# Altium PCB Panelmeter_PCB.PcbDoc (part 1 of 2)
Units mm, origin at the board's own origin, x right, y up, seen from the top; angles counter-clockwise.
Board outline 100 x 44.59 mm, 2 copper layers (Top Layer, Bottom Layer); 74 components, 60 nets, 256 pads, 123 vias.
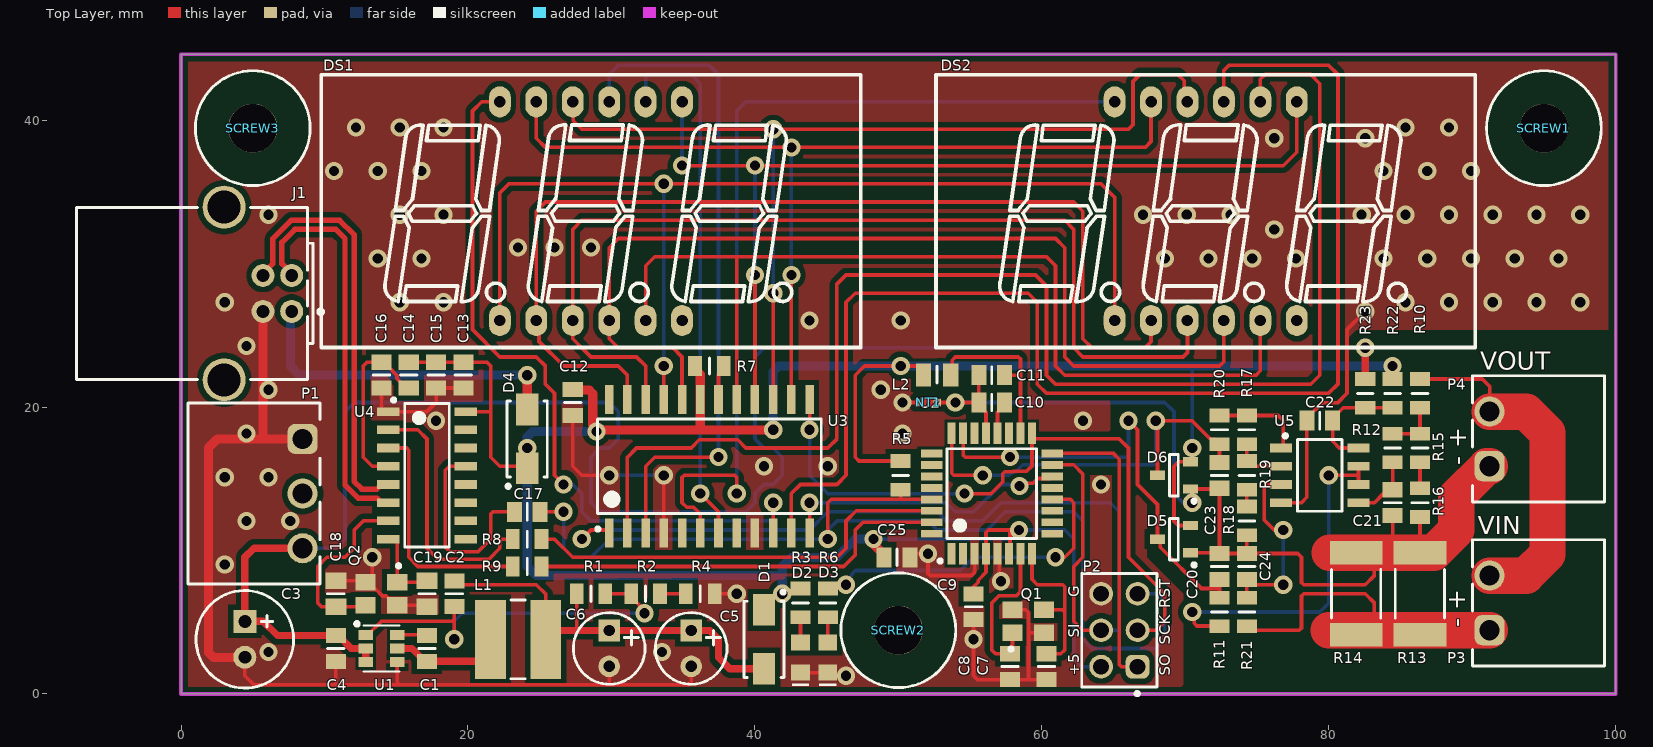
[diagram p0: Top Layer view]
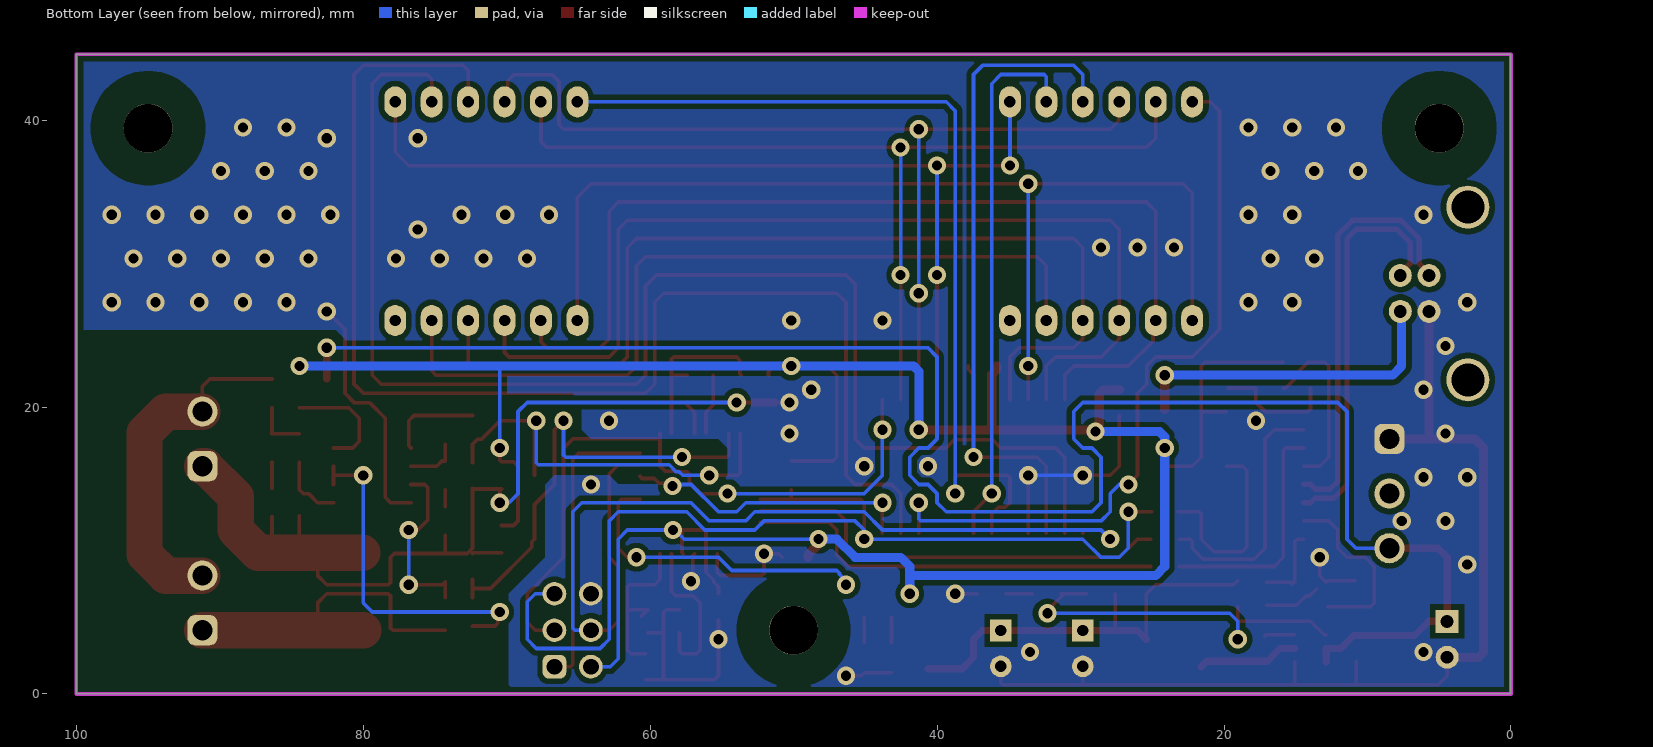
[diagram p1: Bottom Layer view, seen from below]
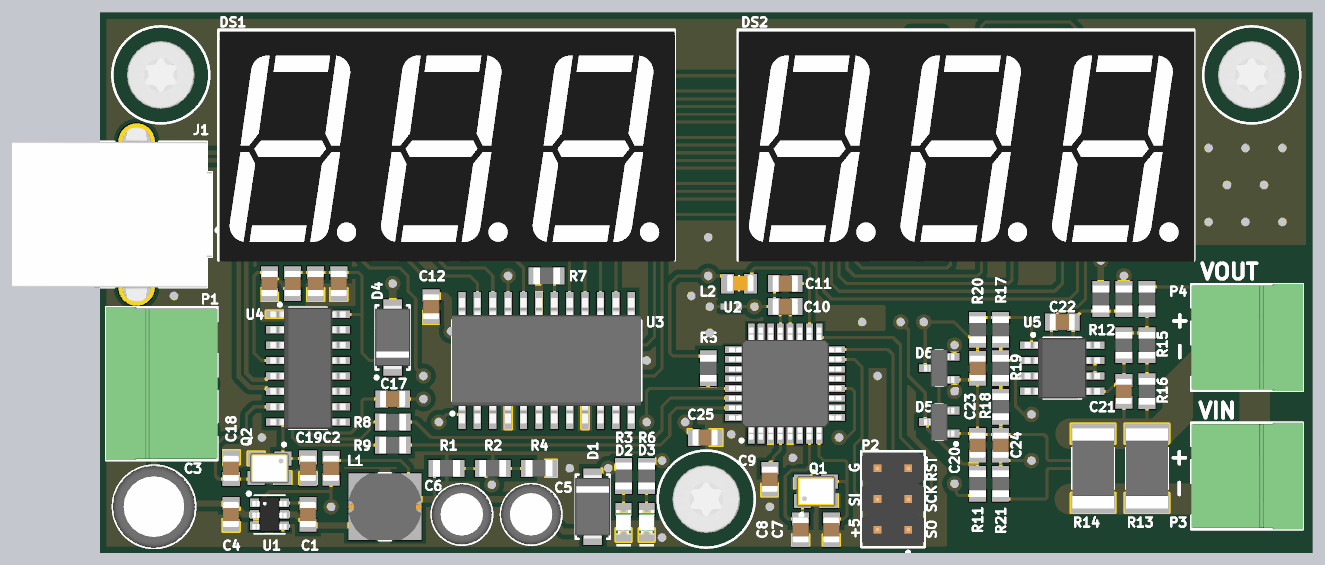
[diagram p2: 3D render of the assembled board from above, using the file's embedded part models]

## Layer stack, top to bottom
Top Solder: solder mask 0.0102, Solder Resist, Dk 3.5
Top Layer: signal copper 0.0356
Dielectric 1: dielectric 0.32, FR-4, Dk 4.8
Bottom Layer: signal copper 0.0356
Bottom Solder: solder mask 0.0102, Solder Resist, Dk 3.5

## Board outline
0,0 100,0 100,44.585 0,44.585

## Design rules (kind name [scope] priority, off if disabled: settings)
Clearance MCU [All vs InComponent('U1') or InComponent('U2')] p1: gap=0.229 ignorepadtopadclearanceinfootprint=FALSE
Clearance Srew [(ObjectKind = 'Pad') And (AsMils(HoleDiameter) = 133.858) And (AsMils(PadXSize_AllLayers) = 133.858) And (AsMils(PadYSize_AllLayers) = 133.858)] p2: gap=2.286 ignorepadtopadclearanceinfootprint=FALSE
Clearance Polygon_Clearance [InPolygon] p3: gap=0.381 ignorepadtopadclearanceinfootprint=FALSE
Clearance Clearance_1 [All] p4: gap=0.254 ignorepadtopadclearanceinfootprint=FALSE
DiffPairsRouting [All] p1: maxlimit=0.254 minlimit=0.254 mostfreqgap=0.254 toplayer_minwidth=0.381 toplayer_maxwidth=0.381 toplayer_prefwidth=0.381 bottomlayer_minwidth=0.381 bottomlayer_maxwidth=0.381 bottomlayer_prefwidth=0.381 maxuncoupledlength=12.7
HoleSize [All] p1: absolutevalues=TRUE maxlimit=3.5 minlimit=0.025 maxpercent=80.000 minpercent=20.000
MinimumSolderMaskSliver [All] p1: minsoldermaskwidth=0.025
PolygonConnect [All] p1: connectstyle=Direct reliefconductorwidth=0.254 reliefentries=4 polygonreliefangle="90 Angle" airgapwidth=0.254
RoutingVias [All] p1: holewidth=0.711 width=1.27 viastyle="Through Hole" minholewidth=0.711 minwidth=1.27 maxholewidth=0.711 maxwidth=1.27
SilkToSilkClearance [All] p1: silktosilkclearance=0.051
SilkToSolderMaskClearance [IsPad] p1: minsilkscreentomaskgap=0.051 clearancetoexposedcopper=TRUE
SolderMaskExpansion [All] p1: expansion=0.102 istentingtop=FALSE
Width [All] p1: maxlimit=2.54 minlimit=0.254 preferedwidth=0.254 minimp=50.000000 maximp=50.000000 favimp=50.000000
25 further rules are at their usual default settings.

## Classes and differential pairs
component class U_USB2UART: C13 C14 C15 C16 C17 C18 C19 D4 J1 Q2 R8 R9 U4
component class U_Display: C12 DS1 DS2 R7 U3
component class U_Analog: C20 C21 C22 C23 C24 D5 D6 NT1 P3 P4 R10 R11 R12 R13 R14 R15 R16 R17 R18 R19 R20 R21 R22 R23 U5
component class MCU: C1 C2 C3 C4 C5 C6 C7 C8 C9 C10 C11 C25 D1 D2 D3 L1 L2 P1 P2 Q1 R1 R2 R3 R4 R5 R6 SCREW1 SCREW2 SCREW3 U1 U2
differential pair D: +D_P -D_N

## Components (designator, comment, footprint, x,y, rotation, side; value= is the part's Value field where it differs from the comment)
C1 "100nF" CAPC2012X135N 17.145,3.175 r270 top
C2 "100pF" CAPC2012X135N 19.05,6.985 r90 top
C3 "100uF" CAPPR250-680X1250 4.445,3.81 r270 top
C4 "100nF" CAPC2012X135N 10.795,3.175 r90 top
C5 "22uF" CAPPR250-500X1100 35.56,3.175 r270 top
C6 "22uF" CAPPR250-500X1100 29.845,3.175 r270 top
C7 "18pF" CAPC2012X135N 60.325,1.905 r90 top
C8 "18pF" CAPC2012X135N 57.785,1.905 r270 top
C9 "100nF" CAPC2012X135N 55.245,6.085 r90 top
C10 "100nF" CAPC2012X135N 56.515,20.32 r0 top
C11 "100nF" CAPC2012X135N 56.515,22.225 r0 top
C12 "100nF" CAPC2012X135N 27.305,20.32 r90 top
C13 "10uF" CAPC2012X135N 19.685,22.225 r90 top
C14 "100nF" CAPC2012X135N 15.875,22.225 r270 top
C15 "100nF" CAPC2012X135N 17.78,22.225 r90 top
C16 "100nF" CAPC2012X135N 13.97,22.225 r90 top
C17 "100nF" CAPC2012X135N 24.13,12.7 r0 top
C18 "22pF" CAPC2012X88N 10.795,6.985 r270 top
C19 "22pF" CAPC2012X88N 17.145,6.985 r90 top
C20 "100nF" CAPC2012X135N 72.39,8.89 r270 top
C21 "100nF" CAPC2012X135N 84.455,13.335 r90 top
C22 "100nF" CAPC2012X135N 79.375,19.05 r0 top
C23 "100nF" CAPC2012X135N 72.39,15.24 r90 top
C24 "100nF" CAPC2012X135N 74.295,8.89 r270 top
C25 "100nF" CAPC2012X135N 49.9,9.525 r180 top
D1 "SS16" DIOM5127X229N 40.64,3.81 r270 top
D2 "Green, 3.2V, 140°" WL-SMCW_0805_150080xx75000 43.18,2.54 r90 top
D3 "Red, 2V, 140°" WL-SMCW_0805_150080xx75000 45.085,2.54 r90 top
D4 "SS16" DIOM5127X229N 24.13,17.78 r90 top
D5 "BAV99" SOT95P240X110-3N 69.215,10.795 r180 top
D6 "BAV99" SOT95P240X110-3N 69.215,15.24 r180 top
DS1 "7SEGMENT-3DIG-CC" 7SEGMENT-3DIG 28.575,33.655 r0 top locked
DS2 "7SEGMENT-3DIG-CC" 7SEGMENT-3DIG 71.425,33.655 r0 top locked
J1 "USB 2.0" ASSMANN_A-USBSB 6.715,27.92 r270 top
L1 "10uH" IND_TRACO_TCK-047 23.495,3.81 r0 top
L2 "10uH" INDC2014X145N 52.705,22.225 r0 top
NT1 "" NET-TIE 52.07,20.32 r180 top net-tie
P1 "691322310003" 691322310003 5.08,13.97 r270 top
P2 "61300621121" 61300621121 65.405,4.445 r90 top
P3 "691322310002" 691322310002 94.615,6.35 r90 top
P4 "691322310002" 691322310002 94.615,17.78 r90 top
Q1 "16MHz" XTAL_EPSON_TSX-3225 59.055,5.08 r90 top
Q2 "12MHz" XTAL_EPSON_TSX-3225 13.97,6.985 r270 top
R1 "270k" RESC2012X60N 28.575,6.985 r180 top
R2 "51k" RESC2012X60N 32.385,6.985 r180 top
R3 "680" RESC2012X60N 43.18,6.35 r90 top
R4 "430" RESC2012X60N 36.195,6.985 r180 top
R5 "10k" RESC2012X60N 50.165,15.24 r90 top
R6 "1k" RESC2012X60N 45.085,6.35 r90 top
R7 "68k" RESC2012X60N 36.83,22.86 r180 top
R8 "470" RESC2012X60N 24.13,10.795 r0 top
R9 "470" RESC2012X60N 24.13,8.89 r0 top
R10 "270k" RESC2012X60N 86.36,20.955 r90 top
R11 "1k" RESC2012X60N 72.39,5.715 r90 top
R12 "1k" RESC2012X60N 84.455,17.145 r270 top
R13 "0R05" RESC_VISHAY_WSL2512_0R007-0R5 86.36,6.985 r270 top
R14 "0R05" RESC_VISHAY_WSL2512_0R007-0R5 81.915,6.985 r270 top
R15 "8k2" RESC2012X60N 86.36,17.145 r90 top
R16 "560" RESC2012X60N 86.36,13.335 r90 top
R17 "100k" RESC2012X60N 74.295,18.415 r90 top
R18 "820" RESC2012X60N 74.295,12.065 r90 top
R19 "12k" RESC2012X60N 74.295,15.24 r90 top
R20 "1k" RESC2012X60N 72.39,18.415 r270 top
R21 "1k" RESC2012X60N 74.295,5.715 r90 top
R22 "0" RESC2012X60N 84.455,20.955 r90 top
R23 "0" RESC2012X60N 82.55,20.955 r90 top
SCREW1 "M3x6" BOSSARD_BN5687-3061605_v 95,39.44 r0 top locked
SCREW2 "M3x6" BOSSARD_BN5687-3061605_v 50,4.445 r0 top locked
SCREW3 "M3x6" BOSSARD_BN5687-3061605_v 5,39.44 r0 top locked
U1 "AP63200WU-7" TSOT26 13.97,3.175 r270 top
U2 "ATMEGA328P-AU" QFP80P900X900X120-32N 56.515,13.97 r90 top
U3 "MAX7219CWG+" SOIC-24W 36.83,15.875 r90 top
U4 "CH340G" SOIC-16 17.145,15.24 r0 top
U5 "LM358AD" SOIC127P600X175-8N 79.375,15.24 r0 top

## Footprints (in the part's own frame and the unit in brackets; to place one, negate y for a bottom-side part, rotate by r counter-clockwise, add the part's x,y. Pads: shape width x height; smd on the part's side, far side on the other; paste and mask are expansions set on the pad)
7SEGMENT-3DIG [mil] "14.2mm 37.6x19mm 7 Segment Display"
  oval 60x85 hole 31.5: 1(-250,-300) 2(-150,-300) 3(-50,-300) 4(50,-300) 5(150,-300) 6(250,-300) 7(250,300) 8(150,300) 9(50,300) 10(-50,300) 11(-150,300) 12(-250,300)
  silkscreen extent -740,-374 740,374, body extent -738,-379 742,369, height 315
61300621121 [mm] "Pin Header, pitch 2.54 mm, THT, Vertical, dual row, 6p"
  rrect50% 1.65x1.65 hole 1.1: 1(-2.54,-1.27)
  round 1.65 hole 1.1: 2(-2.54,1.27) 3(0,-1.27) 4(0,1.27) 5(2.54,-1.27) 6(2.54,1.27)
  silkscreen extent -4.54,-2.62 3.96,2.62, body extent -3.81,-2.54 3.81,2.54, height 8.59
691322310002 [mm] "Horizontal PCB Header, pitch 3.81mm, 02p"
  rrect50% 2.1x2.1 hole 1.4: 1(-1.905,3.4)
  round 2.1 hole 1.4: 2(1.905,3.4)
  silkscreen extent -4.4,-4.6 4.41,4.6, body extent -4.4,-4.6 4.41,4.6, height 7.25
691322310003 [mm] "Horizontal PCB Header, pitch 3.81mm, 03p"
  rrect50% 2.1x2.1 hole 1.4: 1(-3.81,3.4)
  round 2.1 hole 1.4: 2(0,3.4) 3(3.81,3.4)
  silkscreen extent -6.31,-4.6 6.31,4.6, body extent -6.31,-4.6 6.31,4.6, height 7.25
ASSMANN_A-USBSB [mm] "USB 2.0 Style B Right Angle 4 Contacts Receptacle"
  round 1.6 hole 0.9: 1(1.25,1) 2(-1.25,1) 3(-1.25,-1) 4(1.25,-1)
  round 3 hole 2.3: 5(-6.02,-3.71) 5(6.02,-3.71)
  silkscreen extent -6,-14.01 6,3.17, body extent -7.3,-14.01 7.3,2.49, height 10.85
BOSSARD_BN5687-3061605_v [mm] "M3 L=6mm Hexalobular Socket Pan Head Screw, Fully Threaded - Stainless Steel A2"
  silkscreen extent -4,-4 4,4, body extent -2.8,-2.8 2.8,2.8, height 2.4
CAPC2012X88N [mm] "Chip Capacitor, Body 2.0x1.25mm, IPC Medium Density"
  rect 1.15x1.45 smd: 1(-0.9,0) 2(0.9,0)
  silkscreen extent 0,-0.58 0,0.58, body extent -1.05,-0.67 1.05,0.68, height 0.9
CAPC2012X135N [mm] "Chip Capacitor, Body 2.0x1.25mm, IPC Medium Density"
  rect 1.05x1.4 smd: 1(-0.9,0) 2(0.9,0)
  silkscreen extent 0,-0.58 0,0.58, body extent -1.05,-0.67 1.05,0.68, height 1.25
CAPPR250-500X1100 [mm] "Capacitor, Radial, Pin spacing 2.5mm - Body Diameter 5.0mm X Body Height 11mm"
  rect 1.5x1.5 hole 0.8: 1(-1.25,0)
  round 1.5 hole 0.8: 2(1.25,0)
  silkscreen extent -2.5,-2.5 2.5,2.5, body extent -2.51,-2.51 2.49,2.49, height 10.9
CAPPR250-680X1250 [mm] "Capacitor, Radial, Pin spacing 2.5mm - Body Diameter 6.8mm X Body Height 12.5mm"
  rect 1.6x1.6 hole 0.9: 1(-1.25,0)
  round 1.6 hole 0.9: 2(1.25,0)
  silkscreen extent -3.4,-3.4 3.4,3.4, body extent -3.41,-3.41 3.39,3.39, height 12.5
DIOM5127X229N [mm] "DO-214-AC/SMA Diode, Molded Body; 5.10mm L X 2.67mm W X 2.29mm H, IPC Medium Density"
  rect 2.2x1.55 smd: 1(-2.05,0) 2(2.05,0)
  silkscreen extent -3.42,-1.4 2.65,1.45, body extent -2.67,-1.45 2.68,1.45, height 2.29
IND_TRACO_TCK-047 [mm] "SMD Common Mode Choke, Body 5.8x5.2mm"
  rect 2.15x5.5 smd: 1(-1.925,0) 2(1.925,0)
  silkscreen extent -0.5,-2.75 0.5,2.75, body extent -3.05,-2.75 3.05,2.75, height 5.15
INDC2014X145N [mm] "Chip Inductor, EIA 0805, Metric 2014, Body 2.05x1.4mm, IPC Medium Density"
  rect 1.05x1.6 smd: 1(-0.95,0) 2(0.95,0)
  silkscreen extent 0,-0.55 0,0.63, body extent -1,-0.66 1.2,0.74, height 1.45
NET-TIE [mil]
  rect 20x20 smd mask+4: 1(-25,0) 2(25,0)
  Top Layer region: -35,10 35,10 35,-10 -35,-10
QFP80P900X900X120-32N [mm] "QFP,0.80mm Pitch, Square; 32 Pin, 7.00mm L X 7.00mm W X 1.20mm H Body, IPC Medium Density"
  rect 1.5x0.55 smd: 1(-4.2,2.8) 2(-4.2,2) 3(-4.2,1.2) 4(-4.2,0.4) 5(-4.2,-0.4) 6(-4.2,-1.2) 7(-4.2,-2) 8(-4.2,-2.8) 17(4.2,-2.8) 18(4.2,-2) 19(4.2,-1.2) 20(4.2,-0.4) 21(4.2,0.4) 22(4.2,1.2) 23(4.2,2) 24(4.2,2.8)
  rect 0.55x1.5 smd: 9(-2.8,-4.2) 10(-2,-4.2) 11(-1.2,-4.2) 12(-0.4,-4.2) 13(0.4,-4.2) 14(1.2,-4.2) 15(2,-4.2) 16(2.8,-4.2) 25(2.8,4.2) 26(2,4.2) 27(1.2,4.2) 28(0.4,4.2) 29(-0.4,4.2) 30(-1.2,4.2) 31(-2,4.2) 32(-2.8,4.2)
  silkscreen extent -4.82,-3.13 3.13,3.72, body extent -4.62,-4.62 4.62,4.62, height 1.2
RESC2012X60N [mm] "Chip Resistor, EIA 0805, Metric 2012, Body 2.0x1.2mm, IPC Medium Density"
  rect 0.95x1.4 smd: 1(-1,0) 2(1,0)
  silkscreen extent 0,-0.55 0,0.55, body extent -1.1,-0.67 1.1,0.68, height 0.6
RESC_VISHAY_WSL2512_0R007-0R5 [mm] "WSL2512 Chip Resistor Series (For R=0.007 to 0.5, 6.35mm L X 3.18mm W X 0.635mm H"
  rect 1.65x3.68 smd: 1(-2.855,0) 2(2.855,0)
  silkscreen extent -1.68,-1.72 1.68,1.72, body extent -3.3,-1.72 3.3,1.72, height 0.89
SOIC127P600X175-8N [mm] "SOIC 8, Pitch 1.27mm - Body 4x5mm, IPC Medium Density"
  rect 1.55x0.6 smd: 1(-2.7,1.905) 2(-2.7,0.635) 3(-2.7,-0.635) 4(-2.7,-1.905) 5(2.7,-1.905) 6(2.7,-0.635) 7(2.7,0.635) 8(2.7,1.905)
  silkscreen extent -2.52,-2.5 1.55,2.88, body extent -3.1,-2.5 3.1,2.5, height 1.75
SOIC-16 [mm] "SOIC 16, Pitch 1.27mm - Body 4x10mm, IPC Medium Density"
  rect 1.55x0.6 smd: 1(-2.7,4.445) 2(-2.7,3.175) 3(-2.7,1.905) 4(-2.7,0.635) 5(-2.7,-0.635) 6(-2.7,-1.905) 7(-2.7,-3.175) 8(-2.7,-4.445) 9(2.7,-4.445) 10(2.7,-3.175) 11(2.7,-1.905) 12(2.7,-0.635) 13(2.7,0.635) 14(2.7,1.905) 15(2.7,3.175) 16(2.7,4.445)
  silkscreen extent -2.45,-5 1.55,5.37, body extent -3.1,-5 3.1,5, height 1.75
SOIC-24W [mm] "SOIC 24, Pitch 1.27mm - Body 7.6x15.6mm, IPC Medium Density"
  rect 2x0.6 smd: 1(-4.65,6.985) 2(-4.65,5.715) 3(-4.65,4.445) 4(-4.65,3.175) 5(-4.65,1.905) 6(-4.65,0.635) 7(-4.65,-0.635) 8(-4.65,-1.905) 9(-4.65,-3.175) 10(-4.65,-4.445) 11(-4.65,-5.715) 12(-4.65,-6.985) 13(4.65,-6.985) 14(4.65,-5.715) 15(4.65,-4.445) 16(4.65,-3.175) 17(4.65,-1.905) 18(4.65,-0.635) 19(4.65,0.635) 20(4.65,1.905) 21(4.65,3.175) 22(4.65,4.445) 23(4.65,5.715) 24(4.65,6.985)
  silkscreen extent -4.5,-7.8 3.3,7.9, body extent -5.18,-7.8 5.18,7.8, height 1.68
SOT95P240X110-3N [mm] "SOT23 3-Leads, Pitch 0.95mm, Body 1.3x2.9mm, IPC Medium Density"
  rect 1.05x0.65 smd: 1(-1.15,0.95) 2(-1.15,-0.95) 3(1.15,0)
  silkscreen extent -1.53,-1.45 0.3,1.92, body extent -1.25,-1.5 1.25,1.5, height 1.1
TSOT26 [mm]
  rect 0.7x1 smd: 1(-0.95,-1.099) 2(0,-1.099) 3(0.95,-1.099) 4(0.95,1.099) 5(0,1.099) 6(-0.95,1.099)
  silkscreen extent -1.85,-1.84 1.6,1.27, body extent -1.45,-1.41 1.45,1.41, height 1.01
WL-SMCW_0805_150080xx75000 [mm] "SMD Mono-color Chip LED, body 2.0x1.25mm"
  rect 1.1x1.3 smd: 1(-1.05,0) 2(1.05,0)
  silkscreen extent -2,-0.6 -1.8,0.6, body extent -1,-0.63 1,0.62, height 0.7
XTAL_EPSON_TSX-3225 [mm] "Crystal TSX-3225 Serie, Corner Concave; 4 pin, 2.50mm L X 3.2mm W X 0.6mm H"
  rect 1.15x1.4 smd: 1(-0.8,1.1) 2(-0.8,-1.1) 3(0.8,-1.1) 4(0.8,1.1)
  silkscreen extent -2.07,1.07 -1.83,1.32, body extent -1.25,-1.6 1.25,1.6, height 0.6

## Part data
C1 C4 C9 C10 C11 C12 C14 C15 C16 C17 C20 C21 C22 C23 C24 C25: library part CC0805_100NF_50V_10%_X7R, "Non-polarised capacitor", Case=0805, Manufacturer=GENERIC, Manufacturer1 ComponentHeight=1mm, Manufacturer1 Example=TDK, Manufacturer1 Part Number=C2012X7R1H104K085, Tolerance=±10%, Voltage=50V, Author="CERN DEM JLC", Component Type=Standard, CreateDate=3.12.2007, HelpURL=\\cern.ch\dfs\Applications\Altium\Datasheets\CC0805_X7R_TDK_C.pdf, LatestRevisionDate=22.04.2015, Manufacturer Part Number=CC0805_100NF_50V_10%_X7R, Mounted=Yes, Part Description="SMD Multilayer Chip Ceramic Capacitor", Part Number=CC0805_100NF_50V_10%_X7R, Pin Count=2, Sense=No, SMD=Yes, Socket=No, Status=None, TC=X7R
C2: library part CC0805_100PF_50V_5%_NP0, "Non-polarised capacitor", Case=0805, Manufacturer=GENERIC, Manufacturer1 ComponentHeight=1.35mm, Manufacturer1 Example=PHYCOMP, Manufacturer1 Part Number=223886115101, Tolerance=±5%, Voltage=50V, Author="CERN DEM JLC", Component Type=Standard, CreateDate=3.12.2007, HelpURL=\\cern.ch\dfs\Applications\Altium\Datasheets\CC0805_NP0_PHYCOMP.pdf, LatestRevisionDate=3.12.2007, Manufacturer Part Number=CC0805_100PF_50V_5%_NP0, Mounted=Yes, Part Description="SMD Multilayer Chip Ceramic Capacitor", Part Number=CC0805_100PF_50V_5%_NP0, Pin Count=2, Sense=No, SMD=Yes, Socket=No, Status=Preferred, TC=C0G/NP0
C3: library part CAER_100UF_25V_20%_NICHICON_UPS1E101MED, "Polarised capacitor", Case="LS2.5 D6.3 x H11", Manufacturer=NICHICON, Manufacturer Part Number=UPS1E101MED, Tolerance=±20%, Voltage=25V, Author="CERN DEM MR", Component Type=Standard, ComponentHeight=12.5mm, CreateDate=30.05.2016, HelpURL=\\cern.ch\dfs\Applications\Altium\Datasheets\CAER_NICHICON_UPS.pdf, LatestRevisionDate=30.05.2016, Mounted=Yes, Part Description="Aluminium Electrolytic Capacitor (UPS Series)", Part Number=CAER_100UF_25V_20%_NICHICON_UPS1E101MED, Pin Count=2, Sense=No, SMD=No, Socket=No, Status=None
C5 C6: library part CAER_47UF_25V_20%_250-500X1100, "Polarised capacitor", Case="LS2.5 D5 x H11", Manufacturer=GENERIC, Manufacturer1 ComponentHeight=11mm, Manufacturer1 Example=PANASONIC, Manufacturer1 Part Number=EEUFC1E470, Part Number=CAER_22UF_25V_20%_250-500X1100, Tolerance=±20%, Voltage=25V, Author="CERN DEM JLC", Component Type=Standard, ComponentHeight=11mm, CreateDate=18.12.2007, HelpURL=\\cern.ch\dfs\Applications\Altium\Datasheets\CAER_PANASONIC_FC.pdf, LatestRevisionDate=18.12.2007, Manufacturer Part Number=CAER_47UF_25V_20%_250-500X1100, Mounted=Yes, Part Description="Aluminum Electrolytic Capacitor", Pin Count=2, Sense=No, SMD=No, Socket=No, Status=Preferred
C7 C8: library part CC0805_18PF_50V_5%_NP0, "Non-polarised capacitor", Case=0805, Manufacturer=GENERIC, Manufacturer1 ComponentHeight=1.35mm, Manufacturer1 Example=PHYCOMP, Manufacturer1 Part Number=223886115189, Tolerance=±5%, Voltage=50V, Author="CERN DEM JLC", Component Type=Standard, CreateDate=3.12.2007, HelpURL=\\cern.ch\dfs\Applications\Altium\Datasheets\CC0805_NP0_PHYCOMP.pdf, LatestRevisionDate=3.12.2007, Manufacturer Part Number=CC0805_18PF_50V_5%_NP0, Mounted=Yes, Part Description="SMD Multilayer Chip Ceramic Capacitor", Part Number=CC0805_18PF_50V_5%_NP0, Pin Count=2, Sense=No, SMD=Yes, Socket=No, Status=Preferred, TC=C0G/NP0
C13: library part CC0805_10UF_10V_10%_X7R, "Non-polarised capacitor", Case=0805, Manufacturer=GENERIC, Manufacturer1 ComponentHeight=1.35mm, Manufacturer1 Example=MURATA, Manufacturer1 Part Number=GRM21BR71A106KE51L, Tolerance=±10%, Voltage=10V, Author="CERN DEM JLC", Component Type=Standard, CreateDate=30.04.2012, HelpURL=\\cern.ch\dfs\Applications\Altium\Datasheets\CC0805_X7R_MURATA.pdf, LatestRevisionDate=30.04.2012, Manufacturer Part Number=CC0805_10UF_10V_10%_X7R, Mounted=Yes, Part Description="SMD Multilayer Chip Ceramic Capacitor", Part Number=CC0805_10UF_10V_10%_X7R, Pin Count=2, Sense=No, SMD=Yes, Socket=No, Status=Preferred, TC=X7R
C18 C19: library part CC0805_22PF_200V_5%_C0G, "Non-polarised capacitor", Case=0805, Manufacturer=GENERIC, Manufacturer1 ComponentHeight=0.88mm, Manufacturer1 Example=KEMET, Manufacturer1 Part Number=C0805C220J2GAC, Tolerance=±5%, Voltage=200V, Author="CERN DEM MR", Component Type=Standard, CreateDate=2.06.2016, HelpURL="\\cern.ch\dfs\Applications\Altium\Datasheets\CC0805_C0G_KEMET_(Commercial Grade).pdf", LatestRevisionDate=2.06.2016, Manufacturer Part Number=CC0805_22PF_200V_5%_C0G, Mounted=Yes, Part Description="SMD Multilayer Chip Ceramic Capacitor", Part Number=CC0805_22PF_200V_5%_C0G, Pin Count=2, Sense=No, SMD=Yes, Socket=No, Status=None, TC=C0G/NP0
D1 D4: "Schottky Diode", Case=DO-214AC, Manufacturer="VISHAY GENERAL SEMICONDUCTOR", Power=1A, Voltage=60V, Author="CERN DEM JLC", Bonding=No, Component Type=Standard, ComponentHeight=2.29mm, CreateDate=15.07.2008, Device=SS16, HelpURL=\\cern.ch\dfs\Applications\Altium\Datasheets\SS16.pdf, LatestRevisionDate=23.08.2010, Manufacturer Part Number=SS16, Mounted=Yes, PackageDescription="DO-214-AC/SMA Diode, Molded Body; 5.10mm L X 2.67mm W X 2.29mm H, IPC Medium Density", Part Description="Surface Mount Schottky Barrier Rectifier", Part Number=SS16, Pin Count=2, PressFit=No, Sense=No, SMD=Yes, Socket=No
D2: library part 150080GS75000, "WL-SMCW Mono-color Chip LED Waterclear, size 0805, Green, 3.2V, 140°", Case/Size Code=0805, Emitting Color=Green, Forward Voltage=3.2V, Manufacturer="Wurth Elektronik", Operating Temperature Max=85°C, Operating Temperature Min=-40°C, Category="Signal LEDs", Chip Technology=InGaN, ComponentLink1Description="Website Link", ComponentLink1URL=https://www.we-online.com/redexpert/article/150080GS75000?ad, ComponentLink2Description="Datasheet Link", ComponentLink2URL=https://www.we-online.com/redexpert/spec/150080GS75000?ad, Dominant Wavelength=525nm, Height=0.7mm, Length=2mm, Luminous Intensity=450mcd, Manufacturer Part Number=150080GS75000, Match Code=WL-SMCW, Mount="Surface Mount", Packaging="Tape and Reel", Peak Wavelength=515nm, Viewing Angle=140°, Width=1.25mm
D3: library part 150080RS75000, "WL-SMCW Mono-color Chip LED Waterclear, size 0805, Red, 2V, 140°", Case/Size Code=0805, Emitting Color=Red, Forward Voltage=2V, Manufacturer="Wurth Elektronik", Operating Temperature Max=85°C, Operating Temperature Min=-40°C, Category="Signal LEDs", Chip Technology=AlInGaP, ComponentLink1Description="Website Link", ComponentLink1URL=https://www.we-online.com/redexpert/article/150080RS75000?ad, ComponentLink2Description="Datasheet Link", ComponentLink2URL=https://www.we-online.com/redexpert/spec/150080RS75000?ad, Dominant Wavelength=625nm, Height=0.7mm, Length=2mm, Luminous Intensity=150mcd, Manufacturer Part Number=150080RS75000, Match Code=WL-SMCW, Mount="Surface Mount", Packaging="Tape and Reel", Peak Wavelength=630nm, Viewing Angle=140°, Width=1.25mm
D5 D6: "Serial Diode", Case=SOT23-3, Manufacturer="FAIRCHILD SEMICONDUCTOR", Power=350mW, Voltage=70V, Author="CERN DEM JLC", Bonding=No, Component Type=Standard, ComponentHeight=1.1mm, CreateDate=6.05.2008, Device=BAV99, HelpURL=\\cern.ch\dfs\Applications\Altium\Datasheets\BAV99.pdf, LatestRevisionDate=27.09.2012, Manufacturer Part Number=BAV99, Mounted=Yes, PackageDescription="SOT, 0.95mm Pitch; 3 Pin, 1.40mm W X 3.00mm L X 1.10mm H body, IPC Medium Density", Part Description="Dual Series Signal Diode", Part Number=BAV99, Pin Count=3, PressFit=No, Sense=No, SMD=Yes, Socket=No
J1: library part ASSMANN_A-USBSB, "4 Pin + 1 Shield USB Receptacle", Manufacturer=ASSMANN, Manufacturer Part Number=A-USBSB, Author="CERN DEM JLC", Component Type=Standard, ComponentHeight=10.85mm, CreateDate=17.04.2018, Family="USB 2.0", HelpURL=\\cern.ch\dfs\Applications\Altium\Datasheets\ASSMANN_A-USBSB.pdf, LatestRevisionDate=17.04.2018, Mounted=Yes, Part Description="USB 2.0 Style B Right Angle 4 Contacts Receptacle", Part Number=ASSMANN_A-USBSB, Pin Count=5, PressFit=No, Sense=No, SMD=No, Socket=No, Status=None
L1: library part IND_10UH_20%_TRACO_TCK-047, "Inductor With Core", Manufacturer="TRACO POWER", Manufacturer Part Number=TCK-047, Power=1.44A, Resistance=0.1R, Tolerance=±20%, Author="CERN DEM JLC", Component Type=Standard, ComponentHeight=4.85mm, CreateDate=16.11.2017, HelpURL=\\cern.ch\dfs\Applications\Altium\Datasheets\IND_TRACO_TCK-047.pdf, LatestRevisionDate=16.11.2017, Mounted=Yes, Part Description="SMD Common Mode Choke", Part Number=IND_10UH_20%_TRACO_TCK-047, Pin Count=2, Sense=No, SMD=Yes, Socket=No
L2: library part IND0805_10NH_5%_EPCOS_B82498B, "Inductor With Core", Case=0805, Manufacturer=EPCOS, Manufacturer Part Number=B82498B3100J, Part Number=IND0805_10UH_5%_EPCOS_B82498B, Power=700mA, Resistance=0.03R, Tolerance=±5%, Author="CERN DEM JLC", Component Type=Standard, ComponentHeight=1.45mm, CreateDate=11.02.2008, HelpURL=\\cern.ch\dfs\Applications\Altium\Datasheets\IND0805_EPCOS_B82498B.pdf, LatestRevisionDate=26.06.2008, Mounted=Yes, Part Description="SMT Inductor SIMID Series", Pin Count=2, Sense=No, SMD=Yes, Socket=No, Status=Preferred
NT1: library part "Net Tie", "Net Tie"
P1: "WR-TBL Series 322 Horizontal PCB Header, THT, pitch 3.81mm, 3p", Manufacturer="Wurth Elektronik", Operating Temperature Max=105°C, Operating Temperature Min=-40°C, Rated Current=10A, Working Voltage=300V, Application=Pluggable, Category="Terminal Blocks", ComponentLink1Description="Website Link", ComponentLink1URL=https://www.we-online.com/redexpert/article/691322310003?ad, ComponentLink2Description="Datasheet Link", ComponentLink2URL=https://www.we-online.com/redexpert/spec/691322310003?ad, Manufacturer Part Number=691322310003, Match Code=WR-TBL, Modularity=No, Mount="Through Hole", Number of Pins=3, Number of Rows=1, Orientation=Horizontal, Packaging=Box, Pitch=3.81mm
P2: "WR-PHD Pin Header, THT, Vertical, pitch 2.54mm, 2 Row, 6P", Contact Resistance=20mOhm, Manufacturer="Wurth Elektronik", Operating Temperature Max=105°C, Operating Temperature Min=-40°C, Rated Current=3A, Withstanding Voltage=500V, Working Voltage=250V, Category="Board-to-Board Connectors", ComponentLink1Description="Website Link", ComponentLink1URL=https://www.we-online.com/redexpert/article/61300621121?ad, ComponentLink2Description="Datasheet Link", ComponentLink2URL=https://www.we-online.com/redexpert/spec/61300621121?ad, Gender="Pin Header", Manufacturer Part Number=61300621121, Match Code=WR-PHD, Mount="Through Hole", Number of Pins=6, Number of Rows=2, Orientation=Vertical, Packaging=Bag, Pitch=2.54mm
P3 P4: "WR-TBL Series 322 Horizontal PCB Header, THT, pitch 3.81mm, 2p", Manufacturer="Wurth Elektronik", Operating Temperature Max=105°C, Operating Temperature Min=-40°C, Rated Current=10A, Working Voltage=300V, Application=Pluggable, Category="Terminal Blocks", ComponentLink1Description="Website Link", ComponentLink1URL=https://www.we-online.com/redexpert/article/691322310002?ad, ComponentLink2Description="Datasheet Link", ComponentLink2URL=https://www.we-online.com/redexpert/spec/691322310002?ad, Manufacturer Part Number=691322310002, Match Code=WR-TBL, Modularity=No, Mount="Through Hole", Number of Pins=2, Number of Rows=1, Orientation=Horizontal, Packaging=Box, Pitch=3.81mm
Q1: library part "XTAL_40MHZ_EPSON_TSX-3225 40.0000MF10Z-B6", "Crystal 4 pins 1=XTAL Control 2=GND3=XTAL 4=GND", Manufacturer=EPSON, Manufacturer Part Number="TSX-3225 40.0000MF10Z-B6", Part Number="XTAL_16MHZ_EPSON_TSX-3225 40.0000MF10Z-B6", Author="CERN DEM HF", Bonding=No, Component Type=Standard, ComponentHeight=0.6mm, ComponentLink1Description="Ordering Informations", ComponentLink1URL=\\cern.ch\dfs\Applications\Altium\Datasheets\XTAL_EPSON_TSX-3225_Ordering-Informations.pdf, CreateDate=24.10.2023, HelpURL=\\cern.ch\dfs\Applications\Altium\Datasheets\XTAL_EPSON_TSX-3225.pdf, LatestRevisionDate=24.10.2023, Mounted=Yes, PackageDescription="Crystal, Corner Concave; 4 Pin, 2.50mm L X 3.20mm W X 0.6mm H, TSX-3225 Serie", Part Description="Tolerance: ±10ppm,  Stability:±10ppm, -20°C to 75°C, 10pF, Surface Mount Quartz Crystal, TX-3225 Series", Pin Count=4, PressFit=No, Sense=No, SMD=Yes, Socket=No
Q2: library part "XTAL_40MHZ_EPSON_TSX-3225 40.0000MF10Z-B6", "Crystal 4 pins 1=XTAL Control 2=GND3=XTAL 4=GND", Manufacturer=EPSON, Manufacturer Part Number="TSX-3225 12.0000MF10Z-B6", Part Number="XTAL_12MHZ_EPSON_TSX-3225 12.0000MF10Z-B6", Author="CERN DEM HF", Bonding=No, Component Type=Standard, ComponentHeight=0.6mm, ComponentLink1Description="Ordering Informations", ComponentLink1URL=\\cern.ch\dfs\Applications\Altium\Datasheets\XTAL_EPSON_TSX-3225_Ordering-Informations.pdf, CreateDate=24.10.2023, HelpURL=\\cern.ch\dfs\Applications\Altium\Datasheets\XTAL_EPSON_TSX-3225.pdf, LatestRevisionDate=24.10.2023, Mounted=Yes, PackageDescription="Crystal, Corner Concave; 4 Pin, 2.50mm L X 3.20mm W X 0.6mm H, TSX-3225 Serie", Part Description="Tolerance: ±10ppm,  Stability:±10ppm, -20°C to 75°C, 10pF, Surface Mount Quartz Crystal, TX-3225 Series", Pin Count=4, PressFit=No, Sense=No, SMD=Yes, Socket=No
R1 R10: library part R0805_270K_1%_0.125W_100PPM, "Resistor - 1%", Case=0805, Manufacturer=GENERIC, Manufacturer1 ComponentHeight=0.6mm, Manufacturer1 Example="NIC COMPONENT", Manufacturer1 Part Number=NRC10F2703TRF, Power=0.125W, Tolerance=±1%, Author="CERN DEM JLC", Component Type=Standard, CreateDate=3.12.2007, HelpURL=\\cern.ch\dfs\Applications\Altium\Datasheets\R0805_NIC_NRC.pdf, LatestRevisionDate=13.03.2008, Manufacturer Part Number=R0805_270K_1%_0.125W_100PPM, Mounted=Yes, Part Description="General Purpose Thick Film Chip Resistor", Part Number=R0805_270K_1%_0.125W_100PPM, Pin Count=2, PressFit=No, Sense=No, SMD=Yes, Socket=No, Status=Preferred, TC=±100ppm/°C
R2: library part R0805_51K_1%_0.125W_100PPM, "Resistor - 1%", Case=0805, Manufacturer=GENERIC, Manufacturer1 ComponentHeight=0.6mm, Manufacturer1 Example="NIC COMPONENT", Manufacturer1 Part Number=NRC10F5102TRF, Power=0.125W, Tolerance=±1%, Author="CERN DEM JLC", Component Type=Standard, CreateDate=3.12.2007, HelpURL=\\cern.ch\dfs\Applications\Altium\Datasheets\R0805_NIC_NRC.pdf, LatestRevisionDate=13.03.2008, Manufacturer Part Number=R0805_51K_1%_0.125W_100PPM, Mounted=Yes, Part Description="General Purpose Thick Film Chip Resistor", Part Number=R0805_51K_1%_0.125W_100PPM, Pin Count=2, PressFit=No, Sense=No, SMD=Yes, Socket=No, Status=Preferred, TC=±100ppm/°C
R3: library part R0805_680R_1%_0.125W_100PPM, "Resistor - 5%", Case=0805, Manufacturer=GENERIC, Manufacturer1 ComponentHeight=0.6mm, Manufacturer1 Example="NIC COMPONENT", Manufacturer1 Part Number=NRC10F6800TRF, Manufacturer Part Number=R0805_680R_5%_0.125W_100PPM, Power=0.125W, Tolerance=±5%, Author="CERN DEM JLC", Component Type=Standard, CreateDate=3.12.2007, HelpURL=\\cern.ch\dfs\Applications\Altium\Datasheets\R0805_NIC_NRC.pdf, LatestRevisionDate=13.03.2008, Mounted=Yes, Part Description="General Purpose Thick Film Chip Resistor", Part Number=R0805_680R_5%_0.125W_100PPM, Pin Count=2, PressFit=No, Sense=No, SMD=Yes, Socket=No, Status=Preferred, TC=±100ppm/°C
R4: library part R0805_430R_1%_0.125W_100PPM, "Resistor - 1%", Case=0805, Manufacturer=GENERIC, Manufacturer1 ComponentHeight=0.6mm, Manufacturer1 Example="NIC COMPONENT", Manufacturer1 Part Number=NRC10F4300TRF, Power=0.125W, Tolerance=±1%, Author="CERN DEM JLC", Component Type=Standard, CreateDate=3.12.2007, HelpURL=\\cern.ch\dfs\Applications\Altium\Datasheets\R0805_NIC_NRC.pdf, LatestRevisionDate=13.03.2008, Manufacturer Part Number=R0805_430R_1%_0.125W_100PPM, Mounted=Yes, Part Description="General Purpose Thick Film Chip Resistor", Part Number=R0805_430R_1%_0.125W_100PPM, Pin Count=2, PressFit=No, Sense=No, SMD=Yes, Socket=No, Status=Preferred, TC=±100ppm/°C
R5: library part R0805_10K_1%_0.125W_100PPM, "Resistor - 5%", Case=0805, Manufacturer=GENERIC, Manufacturer1 ComponentHeight=0.6mm, Manufacturer1 Example="NIC COMPONENT", Manufacturer1 Part Number=NRC10F1002TRF, Manufacturer Part Number=R0805_10K_5%_0.125W_100PPM, Power=0.125W, Tolerance=±5%, Author="CERN DEM JLC", Component Type=Standard, CreateDate=3.12.2007, HelpURL=\\cern.ch\dfs\Applications\Altium\Datasheets\R0805_NIC_NRC.pdf, LatestRevisionDate=13.03.2008, Mounted=Yes, Part Description="General Purpose Thick Film Chip Resistor", Part Number=R0805_10K_5%_0.125W_100PPM, Pin Count=2, PressFit=No, Sense=No, SMD=Yes, Socket=No, Status=Preferred, TC=±100ppm/°C
R6 R11 R12 R20 R21: library part R0805_1K_1%_0.125W_100PPM, "Resistor - 5%", Case=0805, Manufacturer=GENERIC, Manufacturer1 ComponentHeight=0.6mm, Manufacturer1 Example="NIC COMPONENT", Manufacturer1 Part Number=NRC10F1001TRF, Manufacturer Part Number=R0805_1K_5%_0.125W_100PPM, Power=0.125W, Tolerance=±5%, Author="CERN DEM JLC", Component Type=Standard, CreateDate=3.12.2007, HelpURL=\\cern.ch\dfs\Applications\Altium\Datasheets\R0805_NIC_NRC.pdf, LatestRevisionDate=13.03.2008, Mounted=Yes, Part Description="General Purpose Thick Film Chip Resistor", Part Number=R0805_1K_5%_0.125W_100PPM, Pin Count=2, PressFit=No, Sense=No, SMD=Yes, Socket=No, Status=Preferred, TC=±100ppm/°C
R7: library part R0805_68K_1%_0.125W_100PPM, "Resistor - 5%", Case=0805, Manufacturer=GENERIC, Manufacturer1 ComponentHeight=0.6mm, Manufacturer1 Example="NIC COMPONENT", Manufacturer1 Part Number=NRC10F6802TRF, Manufacturer Part Number=R0805_68K_5%_0.125W_100PPM, Power=0.125W, Tolerance=±5%, Author="CERN DEM JLC", Component Type=Standard, CreateDate=3.12.2007, HelpURL=\\cern.ch\dfs\Applications\Altium\Datasheets\R0805_NIC_NRC.pdf, LatestRevisionDate=13.03.2008, Mounted=Yes, Part Description="General Purpose Thick Film Chip Resistor", Part Number=R0805_68K_1%_0.125W_100PPM, Pin Count=2, PressFit=No, Sense=No, SMD=Yes, Socket=No, Status=Preferred, TC=±100ppm/°C
R8 R9: library part R0805_470R_1%_0.125W_100PPM, "Resistor - 5%", Case=0805, Manufacturer=GENERIC, Manufacturer1 ComponentHeight=0.6mm, Manufacturer1 Example="NIC COMPONENT", Manufacturer1 Part Number=NRC10F4700TRF, Manufacturer Part Number=R0805_470R_5%_0.125W_100PPM, Power=0.125W, Tolerance=±5%, Author="CERN DEM JLC", Component Type=Standard, CreateDate=3.12.2007, HelpURL=\\cern.ch\dfs\Applications\Altium\Datasheets\R0805_NIC_NRC.pdf, LatestRevisionDate=13.03.2008, Mounted=Yes, Part Description="General Purpose Thick Film Chip Resistor", Part Number=R0805_470R_5%_0.125W_100PPM, Pin Count=2, PressFit=No, Sense=No, SMD=Yes, Socket=No, Status=Preferred, TC=±100ppm/°C
R13 R14: library part R2512_0R05_1%_1W_75PPM_VISHAY_WSL, "Resistor - 1%", Case=2512, Manufacturer="VISHAY DALE", Manufacturer Part Number=WSL2512R0500FEA, Power=1W, Tolerance=±1%, Author="CERN DEM BC", Component Type=Standard, ComponentHeight=0.89mm, CreateDate=11.11.2020, HelpURL=\\cern.ch\dfs\Applications\Altium\Datasheets\R2512_VISHAY_WSL.pdf, LatestRevisionDate=11.11.2020, Mounted=Yes, Part Description="Power Metal Strip® Resistor", Part Number=R2512_0R05_1%_1W_75PPM_VISHAY_WSL, Pin Count=2, PressFit=No, Sense=No, SMD=Yes, Socket=No, Status=None, TC=±75ppm/°C
R15: library part R0805_8K2_1%_0.125W_100PPM, "Resistor - 1%", Case=0805, Manufacturer=GENERIC, Manufacturer1 ComponentHeight=0.6mm, Manufacturer1 Example="NIC COMPONENT", Manufacturer1 Part Number=NRC10F8201TRF, Power=0.125W, Tolerance=±1%, Author="CERN DEM JLC", Component Type=Standard, CreateDate=3.12.2007, HelpURL=\\cern.ch\dfs\Applications\Altium\Datasheets\R0805_NIC_NRC.pdf, LatestRevisionDate=13.03.2008, Manufacturer Part Number=R0805_8K2_1%_0.125W_100PPM, Mounted=Yes, Part Description="General Purpose Thick Film Chip Resistor", Part Number=R0805_8K2_1%_0.125W_100PPM, Pin Count=2, PressFit=No, Sense=No, SMD=Yes, Socket=No, Status=Preferred, TC=±100ppm/°C
R16: library part R0805_560R_1%_0.125W_100PPM, "Resistor - 1%", Case=0805, Manufacturer=GENERIC, Manufacturer1 ComponentHeight=0.6mm, Manufacturer1 Example="NIC COMPONENT", Manufacturer1 Part Number=NRC10F5600TRF, Power=0.125W, Tolerance=±1%, Author="CERN DEM JLC", Component Type=Standard, CreateDate=3.12.2007, HelpURL=\\cern.ch\dfs\Applications\Altium\Datasheets\R0805_NIC_NRC.pdf, LatestRevisionDate=13.03.2008, Manufacturer Part Number=R0805_560R_1%_0.125W_100PPM, Mounted=Yes, Part Description="General Purpose Thick Film Chip Resistor", Part Number=R0805_560R_1%_0.125W_100PPM, Pin Count=2, PressFit=No, Sense=No, SMD=Yes, Socket=No, Status=Preferred, TC=±100ppm/°C
R17: library part R0805_100K_1%_0.125W_100PPM, "Resistor - 1%", Case=0805, Manufacturer=GENERIC, Manufacturer1 ComponentHeight=0.6mm, Manufacturer1 Example="NIC COMPONENT", Manufacturer1 Part Number=NRC10F1003TRF, Power=0.125W, Tolerance=±1%, Author="CERN DEM JLC", Component Type=Standard, CreateDate=3.12.2007, HelpURL=\\cern.ch\dfs\Applications\Altium\Datasheets\R0805_NIC_NRC.pdf, LatestRevisionDate=13.03.2008, Manufacturer Part Number=R0805_100K_1%_0.125W_100PPM, Mounted=Yes, Part Description="General Purpose Thick Film Chip Resistor", Part Number=R0805_100K_1%_0.125W_100PPM, Pin Count=2, PressFit=No, Sense=No, SMD=Yes, Socket=No, Status=Preferred, TC=±100ppm/°C
R18: library part R0805_820R_1%_0.125W_100PPM, "Resistor - 1%", Case=0805, Manufacturer=GENERIC, Manufacturer1 ComponentHeight=0.6mm, Manufacturer1 Example="NIC COMPONENT", Manufacturer1 Part Number=NRC10F8200TRF, Power=0.125W, Tolerance=±1%, Author="CERN DEM JLC", Component Type=Standard, CreateDate=3.12.2007, HelpURL=\\cern.ch\dfs\Applications\Altium\Datasheets\R0805_NIC_NRC.pdf, LatestRevisionDate=13.03.2008, Manufacturer Part Number=R0805_820R_1%_0.125W_100PPM, Mounted=Yes, Part Description="General Purpose Thick Film Chip Resistor", Part Number=R0805_820R_1%_0.125W_100PPM, Pin Count=2, PressFit=No, Sense=No, SMD=Yes, Socket=No, Status=Preferred, TC=±100ppm/°C
R19: library part R0805_12K_1%_0.125W_100PPM, "Resistor - 1%", Case=0805, Manufacturer=GENERIC, Manufacturer1 ComponentHeight=0.6mm, Manufacturer1 Example="NIC COMPONENT", Manufacturer1 Part Number=NRC10F1202TRF, Power=0.125W, Tolerance=±1%, Author="CERN DEM JLC", Component Type=Standard, CreateDate=3.12.2007, HelpURL=\\cern.ch\dfs\Applications\Altium\Datasheets\R0805_NIC_NRC.pdf, LatestRevisionDate=13.03.2008, Manufacturer Part Number=R0805_12K_1%_0.125W_100PPM, Mounted=Yes, Part Description="General Purpose Thick Film Chip Resistor", Part Number=R0805_12K_1%_0.125W_100PPM, Pin Count=2, PressFit=No, Sense=No, SMD=Yes, Socket=No, Status=Preferred, TC=±100ppm/°C
R22 R23: library part R0805_0R_JUMPER, "Resistor", Case=0805, Manufacturer=GENERIC, Manufacturer1 ComponentHeight=0.6mm, Manufacturer1 Example="NIC COMPONENT", Manufacturer1 Part Number=NRC10Z0, Author="CERN DEM JLC", Component Type=Standard, CreateDate=3.12.2007, HelpURL=\\cern.ch\dfs\Applications\Altium\Datasheets\R0805_NIC_NRC.pdf, LatestRevisionDate=13.03.2008, Manufacturer Part Number=R0805_0R_JUMPER, Mounted=Yes, Part Description="2A (0.05R Max DC Resistance) Zero Ohm Jumper", Part Number=R0805_0R_JUMPER, Pin Count=2, PressFit=No, Sense=No, SMD=Yes, Socket=No, Status=Preferred
SCREW1 SCREW2 SCREW3: library part BOSSARD_BN5687-3061605_v, "Screw", Manufacturer=BOSSARD, Manufacturer Part Number="BN5687 Art.3061605", Author="CERN DEM JLC", Component Type=Mechanical, ComponentHeight=2.4mm, CreateDate=15.01.2013, HelpURL=\\cern.ch\dfs\Applications\Altium\Datasheets\BOSSARD_BN5687-3061605.pdf, LatestRevisionDate=15.01.2013, Mounted=Yes, PackageDescription="M3 L=6mm Hexalobular Socket Pan Head Screw, Fully Threaded - Stainless Steel A2", Part Description="M3 L=6mm Hexalobular Socket Pan Head Screw, Fully Threaded, Stainless Steel A2", Part Number=BOSSARD_BN5687-3061605_v, Pin Count=0, PressFit=No, Sense=No, SMD=No, Socket=No, Status=None
U1: "Switching Regulator", Manufacturer=Diodes, Supplier Part Number=2108618, Category="Voltage Regulators - Switching", ComponentLink1Description=https://datasheet.ciiva.com:443/pdfs/VipMasterIC/IC/DIOD/DIOD-S-A0007089856/DIOD-S-A0007089856-1.pdf?src-supplier=IHS+Markit, ComponentLink1URL=https://datasheet.ciiva.com:443/pdfs/VipMasterIC/IC/DIOD/DIOD-S-A0007089856/DIOD-S-A0007089856-1.pdf?src-supplier=IHS+Markit, ComponentLink2Description=https://www.diodes.com/assets/Datasheets/AP63200-AP63201-AP63203-AP63205.pdf?src-supplier=Digikey, ComponentLink2URL=https://www.diodes.com/assets/Datasheets/AP63200-AP63201-AP63203-AP63205.pdf?src-supplier=Digikey, Manufacturer Part Number=AP63200WU-7, Pricing="3000=0,285, 6000=0,28, 9000=0,275, 12000=0,275, 15000=0,27 (USD)", RoHS=Yes, Stock=9000, Supplier="Future Electronics"
U2: "8-bit AVR Microcontroller, 32KB Flash, 1KB EEPROM, 2KB SRAM, 32-Pin TQFP", Case=QFP32, Manufacturer=ATMEL, Author="CERN DEM JLC", Bonding=No, Component Type=Standard, ComponentHeight=1.2mm, CreateDate=2.07.2014, Device=ATMEGA328P-AU, HelpURL=\\cern.ch\dfs\Applications\Altium\Datasheets\ATMEGA328P-AU.pdf, LatestRevisionDate=2.07.2014, Manufacturer Part Number=ATMEGA328P-AU, Mounted=Yes, PackageDescription="QFP, 0.80mm Pitch, Square; 32 Pin, 7.00mm L X 7.00mm W X 1.20mm H body, IPC Medium Density", Part Description="8-bit AVR Microcontroller, 32KB Flash, 1KB EEPROM, 2KB SRAM, 32-Pin TQFP, Industrial Grade (-40°C to 85°C)", Part Number=ATMEGA328P-AU, Pin Count=32, PressFit=No, Sense=No, SMD=Yes, Socket=No
U3: "LED Driver, 7-Segment, MOS, PDSO24", Case/Package=SOP, Manufacturer=Maxim, Max Operating Temperature=70°C, Max Supply Voltage=5.5V, Min Operating Temperature=0°C, Min Supply Voltage=4V, Nominal Supply Voltage=5V, Package Body Material=Plastic, Package Equivalence Code=SOP24,.4, Package Shape=Rectangular, Package Style="SMALL OUTLINEMeter", Peak Reflow Temperature (Cel)=260°C, Supplier Part Number=700-MAX7219CWG, Temperature Grade=COMMERCIAL, Category="LED Drivers", Channels=1, ComponentLink1Description=https://datasheet.ciiva.com:443/pdfs/VipMasterIC/IC/MAXM/MAXMS13376/MAXMS13376-1.pdf?src-supplier=IHS+Markit, ComponentLink1URL=https://datasheet.ciiva.com:443/pdfs/VipMasterIC/IC/MAXM/MAXMS13376/MAXMS13376-1.pdf?src-supplier=IHS+Markit, ComponentLink2Description=https://www.distrelec.biz/Web/Downloads/_t/ds/max7219_21_eng_tds.pdf?mime=application%2Fpdf&src-supplier=Distrelec, ComponentLink2URL=https://www.distrelec.biz/Web/Downloads/_t/ds/max7219_21_eng_tds.pdf?mime=application%2Fpdf&src-supplier=Distrelec, Data Input Mode=SERIAL, Display Mode=Segment, fmax-Min=1.3MHz, Height - Seated (Max)=2.65mm, JESD-30 Code=R-PDSO-G24, JESD-609 Code=e3, Length=15.4mm, Manufacturer Part Number=MAX7219CWG+, Moisture Sensitivity Level=1, Multiplexed Display Capability=Yes, Number of Digits/Characters=8, Number of Segments=7, Output Characteristics=TOTEM-POLE, Output Polarity=True, Pins=24, Power Supplies=5V, Pricing="1=13,84, 10=12,72, 50=12,2, 100=12,2, 1000=9,56, 10000=9,56 (USD)", Qualification Status="Not Qualified", Reach SVHC Compliant=Yes, RoHS=Yes, RoHS Compliant=Yes, Stock=1573, Supplier=Mouser, Surface Mount=Yes, Technology=MOS, Terminal Finish=Tin, Terminal Form="Gull Wing", Terminal Pitch=1.27mm, Terminal Position=DUAL, Width=7.5mm, Input Characteristics=STANDARD, Interface IC Type="LED DISPLAY DRIVER"
U4: "USB to UART Converter SOP16", Manufacturer Part Number=CH340G
U5: "Dual Operational Amplifier", Case=SOIC8, Manufacturer="TEXAS INSTRUMENTS", Author="CERN DEM JLC", Bonding=No, Component Type=Standard, ComponentHeight=1.75mm, CreateDate=2.12.2008, Device=LM358AD, HelpURL=\\cern.ch\dfs\Applications\Altium\Datasheets\LM358A.pdf, LatestRevisionDate=6.09.2021, Manufacturer Part Number=LM358AD, Mounted=Yes, PackageDescription="SOIC 8, Pitch 1.27mm - Body 4x5mm, IPC Medium Density", Part Description="Dual Operational Amplifier, Vos=3mV, Iq/CH=350uA, 0°C to 70°C", Part Number=LM358AD, Pin Count=8, PressFit=No, Sense=No, SMD=Yes, Socket=No
DS1 DS2: ComponentLink1Description="Ozdisan Link", ComponentLink1URL=https://ozdisan.com/tft-lcd-ve-led-ekranlar/led-ekran-modulleri/karakter-ve-numerik-led-displayler/E1-3056-CUR-1-CT/387322

## Free pads (board coordinates)
  round 3.4 hole 3.4: ""(5,39.44) ""(50,4.445) ""(95,39.44)

## Via types
v1: diameter 1.27, hole 0.711, Top Layer to Bottom Layer, tented both sides, 123 vias

## Nets (pads, with @x,y where several pads share a name; then routed paths per layer and width w, separated by ;. In a path a pad name is that pad's centre, name@x,y a point inside that pad or via, vN(x,y) a via of type N, cw(c..) or ccw(c..) an arc to the next point about the centre after c; other vN are vias at no path point)
+5: C9.2 C12.2 C13.2 C14.1 C15.2 C25.2 D1.1 D4.1 D5.2 D6.2 L2.1 P2.2 R3.2 R5.2 R7.2 R22.2 U2.4 U2.6 U3.19 U4.16 | length 188.4
  Top Layer w0.254: C14.1 C15.2 C13.2 21.325,23.125 21.59,22.86 21.59,19.685 ; U4.16 21.59,19.685 ; D4.1 23.985,15.875 22.225,15.875 21.59,16.51 21.59,19.685 ; R5.2 47.26,16.24 46.99,16.51 46.99,22.225 47.625,22.86 v1(50.165,22.86) ; v1@50.294,22.86 51.357,22.86 51.755,22.462 L2.1 ; C9.2 55.245,7.471 55.562,7.789 55.562,7.938 56.115,8.49 U2.4 56.115,11.281 56.264,11.43 v1@57.785,11.43 ; U2.6 57.785,9.84 57.785,11.43 ; v1(58.42,11.43) v1@57.785,11.43 ; D5.2 69.53,11.745 69.215,12.06 69.215,15.875 69.53,16.19 D6.2 70.485,16.31 v1(70.485,17.145)
  Top Layer w0.635: C12.2 27.347,21.178 28.453,21.178 28.702,20.929 v1@28.702,18.787 ; v1@29.074,18.415 36.195,18.415 ; R7.2 35.83,22.635 36.195,22.27 U3.19 36.195,18.415 ; v1(41.275,18.415) 36.195,18.415 ; v1(48.26,10.795) 48.382,10.673 48.382,10.318 49,9.7 C25.2
  Bottom Layer w0.254: v1(48.26,10.795) 57.618,10.795 58.253,11.43 v1(58.42,11.43) 61.595,11.43 62.23,10.795 62.23,2.465 62.79,1.905 P2.2 ; v1(70.485,17.145) 70.485,22.86
  Bottom Layer w0.635: v1(28.956,18.288) 24.502,18.288 24.13,17.916 v1(24.13,17.145) 24.13,8.89 24.765,8.255 41.91,8.255 ; v1(41.275,18.415) 41.275,22.488 41.647,22.86 v1(50.165,22.86) 70.485,22.86 v1(84.455,22.86) ; v1(41.91,6.985) 41.91,8.255 ; v1(48.26,10.795) 46.99,10.795 45.72,9.525 42.545,9.525 41.91,8.89 41.91,8.255
A: DS1.11 DS2.11 U3.14 | length 66.4
  Top Layer w0.254: DS1.11 24.765,38.735 25.4,38.1 v1(42.545,38.1) 67.205,38.1 67.615,38.51 DS2.11 DS2.11@67.78,41.11 ; U3.14 v1(42.545,29.21)
  Bottom Layer w0.254: v1(42.545,29.21) v1(42.545,38.1)
AGND: C10.1 C11.1 C20.1 C21.1 C23.1 C24.1 D5.1 D6.1 NT1.1 P4.1 R13.1 R14.1 R16.1 R18.1 U2.21 | length 74.9
  Top Layer w0.254: NT1.1 v1(53.975,20.32) C10.1 ; C11.1 C10.1 ; U2.21 56.115,19.645 55.615,20.145 C10.1 ; D5.1 72.335,9.845 C20.1 ; v1(70.485,13.335) 70.485,14.17 D6.1 72.34,14.29 C23.1 72.39,10.16 72.76,9.79 C24.1 ; R18.1 C24.1 ; R14.1@82.487,9.84 83.185,9.142 83.185,8.255 82.55,7.62 78.254,7.62 78.105,7.769 78.105,9.525 77.84,9.79 C24.1 ; 84.455,9.942 C21.1 ; R13.1@86.36,9.942 R16.1
  Top Layer w2.54: 80.075,9.84 R14.1 82.487,9.84 R13.1 87.31,9.84 88.9,11.43 88.9,13.752 91.023,15.875 P4.1
  Bottom Layer w0.254: v1(53.975,20.32) 68.58,20.32 69.215,19.685 69.215,13.968 69.85,13.333 ; v1@70.358,13.208 v1(70.485,13.335)
B: DS1.7 DS2.7 U3.16 | length 67.8
  Top Layer w0.254: v1(34.925,36.83) v1(40.005,36.83) 76.835,36.83 77.775,37.77 DS2.7 ; DS1.7 DS1.7@34.925,41.593 ; U3.16 v1(40.005,29.21)
  Bottom Layer w0.254: v1(34.925,36.83) DS1.7 ; v1(40.005,29.21) v1(40.005,36.83)
C: DS1.4 DS2.4 U3.20 | length 69.2
  Top Layer w0.254: U3.20 34.925,23.495 34.29,24.13 30.48,24.13 29.845,24.765 DS1.4 29.845,31.115 30.48,31.75 60.96,31.75 61.595,31.115 61.595,23.495 62.23,22.86 72.39,22.86 72.695,23.165 DS2.4
D: DS1.2 DS2.2 U3.23 | length 72.2
  Top Layer w0.254: U3.23 31.115,22.225 30.48,22.86 26.67,22.86 24.956,24.575 24.956,25.845 DS1.2 24.765,33.655 25.4,34.29 62.23,34.29 62.865,33.655 62.865,24.765 63.5,24.13 67.191,24.13 67.615,24.554 DS2.2
D_N: J1.2 U4.6 | length 28.3
  Top Layer w0.381: J1.2 7.715,29.32 7.033,30.003 7.033,31.479 7.938,32.385 10.795,32.385 11.43,31.75 11.43,14.565 12.343,13.652 13.652,13.652 13.97,13.335 U4.6
D_P: J1.3 U4.5 | length 29.4
  Top Layer w0.381: J1.3 5.715,29.32 6.398,30.003 6.398,31.742 7.675,33.02 11.058,33.02 12.065,32.013 12.065,14.828 12.606,14.287 13.652,14.287 13.97,14.605 U4.5
DP: DS1.3 DS2.3 U3.22 | length 70.1
  Top Layer w0.254: U3.22 32.385,22.86 31.75,23.495 28.575,23.495 27.305,24.765 DS1.3 27.305,32.385 27.94,33.02 61.595,33.02 62.23,32.385 62.23,24.13 62.865,23.495 69.85,23.495 70.155,23.8 DS2.3
E: DS1.1 DS2.1 U3.21 | length 76
  Top Layer w0.254: DS1.1 22.225,34.925 22.86,35.56 v1(33.655,35.56) 64.135,35.56 65.075,34.62 DS2.1 ; U3.21 v1(33.655,22.86)
  Bottom Layer w0.254: v1(33.655,22.86) v1(33.655,35.56)
F: DS1.10 DS2.10 U3.15 | length 68.1
  Top Layer w0.254: DS1.10 27.347,41.233 27.347,39.963 27.94,39.37 v1(41.275,39.37) 66.04,39.37 66.358,39.688 66.358,42.699 66.813,43.155 69.527,43.155 69.936,42.746 69.936,41.494 DS2.10 ; U3.15 v1(41.275,27.94)
  Bottom Layer w0.254: v1(41.275,27.94) v1(41.275,39.37)
G: DS1.5 DS2.5 U3.17 | length 68
  Top Layer w0.254: DS1.5 32.385,29.845 33.02,30.48 38.735,30.48 ; U3.17 38.735,30.48 ; DS2.5 75.235,22.53 74.93,22.225 61.595,22.225 60.96,22.86 60.96,29.845 60.325,30.48 38.735,30.48
GND: C3.2 C4.1 C5.2 C6.2 C7.1 C8.2 C9.1 C12.1 C13.1 C15.1 C16.1 C18.1 C19.1 C22.1 C25.1 D2.1 D3.1 J1.4 NT1.2 P1.1 P2.6 Q1.2 Q1.4 Q2.2 Q2.4 R4.1 U1.4 U2.3 U2.5 U3.4 U3.9 U4.1 U5.4 | length 150.1
  Top Layer w0.254: C3.2 4.445,1.27 5.08,0.635 10.795,0.635 ; C4.1 10.795,0.635 ; C18.1@10.865,7.885 Q2.2@12.77,7.885 ; Q2.2 12.887,7.785 13.335,8.233 v1(13.335,9.525) ; Q2.2@13.532,7.337 14.04,6.829 14.301,6.829 Q2.4@14.945,6.185 ; C16.1 13.97,19.858 14.143,19.685 U4.1 17.145,19.685 17.78,20.32 C15.1 C13.1 ; U1.4 15.069,0.806 15.24,0.635 ; Q2.4 C19.1@17.045,6.185 ; C12.1 27.305,15.875 27.94,15.24 v1(29.845,15.24) ; C6.2 29.845,0.635 ; U3.4 v1(33.655,15.24) ; C5.2 35.56,0.784 35.411,0.635 29.845,0.635 ; R4.1 v1(38.735,6.985) ; D2.1 D3.1 45.305,1.27 v1(46.355,1.27) ; v1(50.292,20.32) NT1.2 ; C25.1 51.054,9.779 v1(52.07,9.779) 52.07,8.404 52.219,8.255 55.096,8.255 55.315,8.474 U2.3 ; C9.1 v1(55.245,3.81) 55.245,1.27 55.51,1.005 C8.2 59.055,1.005 ; U2.5 57.032,9.653 57.032,7.97 v1(57.15,7.852) ; Q1.4 58.89,5.88 59.071,5.699 59.071,1.021 59.055,1.005 ; 59.22,4.28 Q1.2 ; C7.1 59.055,1.005 ; U5.4 78.105,13.335 78.475,13.705 C22.1 78.475,19.225 79.539,20.289 80.614,20.289 81.28,20.955 81.28,25.4 v1(82.55,26.67) ; 10.795,0.635 15.24,0.635 ; 15.24,0.635 29.845,0.635
  Top Layer w0.635: C3.2 4.425,2.54 2.277,2.54 1.905,2.912 1.905,17.145 2.54,17.78 5.715,17.78 ; J1.4 5.715,17.78 ; P1.1 5.715,17.78
  Bottom Layer w0.254: v1(29.845,15.24) v1(33.655,15.24)
  other v1: 6.096,2.921 33.528,2.921 3.048,9.017 4.572,12.065 7.62,12.065 64.135,14.605 3.048,15.113 6.096,15.113 40.64,15.875 45.085,15.875 4.572,18.161 50.292,18.161 17.78,19.05 62.865,19.05 6.096,21.209 48.768,21.209 4.572,24.257 43.815,26.035 50.165,26.035 3.048,27.305 15.24,27.305 18.288,27.305 85.344,27.305 88.392,27.305 91.44,27.305 94.488,27.305 97.536,27.305 13.716,30.353 16.764,30.353 68.58,30.353 71.628,30.353 74.676,30.353 77.724,30.353 83.82,30.353 86.868,30.353 89.916,30.353 92.964,30.353 96.012,30.353 23.495,31.115 26.035,31.115 28.575,31.115 76.2,32.385 6.096,33.401 15.24,33.401 18.288,33.401 67.056,33.401 70.104,33.401 73.152,33.401 82.296,33.401 85.344,33.401 88.392,33.401 91.44,33.401 94.488,33.401 97.536,33.401 10.668,36.449 13.716,36.449 16.764,36.449 83.82,36.449 86.868,36.449 89.916,36.449 76.2,38.735 82.55,38.735 12.192,39.497 15.24,39.497 18.288,39.497 85.344,39.497 88.392,39.497
MISO: P2.1 U2.16 | length 20.5
  Top Layer w0.254: U2.16 64.996,16.77 65.405,16.361 65.405,2.054 65.554,1.905 P2.1
MOSI: P2.4 U2.15 U3.1 | length 66.1
  Top Layer w0.254: v1(27.94,10.795) 28.575,11.43 29.672,11.43 29.845,11.257 U3.1 ; U2.15 62.23,15.97 62.865,15.335 62.865,9.525 62.23,8.89 62.23,5.08 62.865,4.445 P2.4
  Bottom Layer w0.254: v1(27.94,10.795) 28.575,11.43 43.815,11.43 45.085,12.7 52.705,12.7 53.34,12.065 55.88,12.065 57.15,13.335 64.77,13.335 65.405,12.7 65.405,4.594 65.256,4.445 P2.4
NetC1_1: C1.1 U1.6 | length 2.1
  Top Layer w0.254: U1.6 17.095,4.125 C1.1
NetC1_2: C1.2 L1.1 U1.5 | length 7.1
  Top Layer w0.508: U1.5 16.102,3.175 16.699,2.578 16.699,2.546 16.97,2.275 C1.2 21.22,2.275 L1.1@21.59,1.905
NetC2_1: C2.1 R1.1 R2.2 U1.1 | length 27.3
  Top Layer w0.254: U1.1 13.02,4.125 13.97,5.075 18.901,5.075 19.05,5.223 ; v1(19.05,3.81) 19.05,5.223 ; C2.1 19.05,5.223 ; R1.1 R2.2@31.115,6.985 ; R2.2 R2.2@31.115,6.985 ; v1(32.308,5.631) 32.308,5.837 31.16,6.985 R2.2@31.115,6.985
  Bottom Layer w0.254: v1(19.05,3.81) 19.05,5.08 19.601,5.631 v1(32.308,5.631)
NetC2_2: C2.2 C5.1 C6.1 D1.2 L1.2 R1.2 | length 29.8
  Top Layer w0.254: C2.2 19.315,7.62 24.765,7.62 25.42,6.965 L1.2 ; R1.2 27.575,4.53 27.68,4.425
  Top Layer w0.508: L1.2 26.035,4.425 27.68,4.425 C6.1 C5.1 36.85,4.425 37.465,3.81 37.465,2.54 38.245,1.76 D1.2
NetC10_2: C10.2 U2.20 | length 2.4
  Top Layer w0.254: U2.20 56.915,19.645 57.415,20.145 C10.2
NetC11_2: C11.2 L2.2 U2.18 | length 12.3